# Altium PCB US_BB_PCB.PcbDoc
Units mm, origin at the board's own origin, x right, y up, seen from the top; angles counter-clockwise.
Board outline 89 x 93.3 mm, 2 copper layers (Top Layer, Bottom Layer), stack 1.58 mm thick; 53 components, 31 nets, 201 pads, 169 vias.
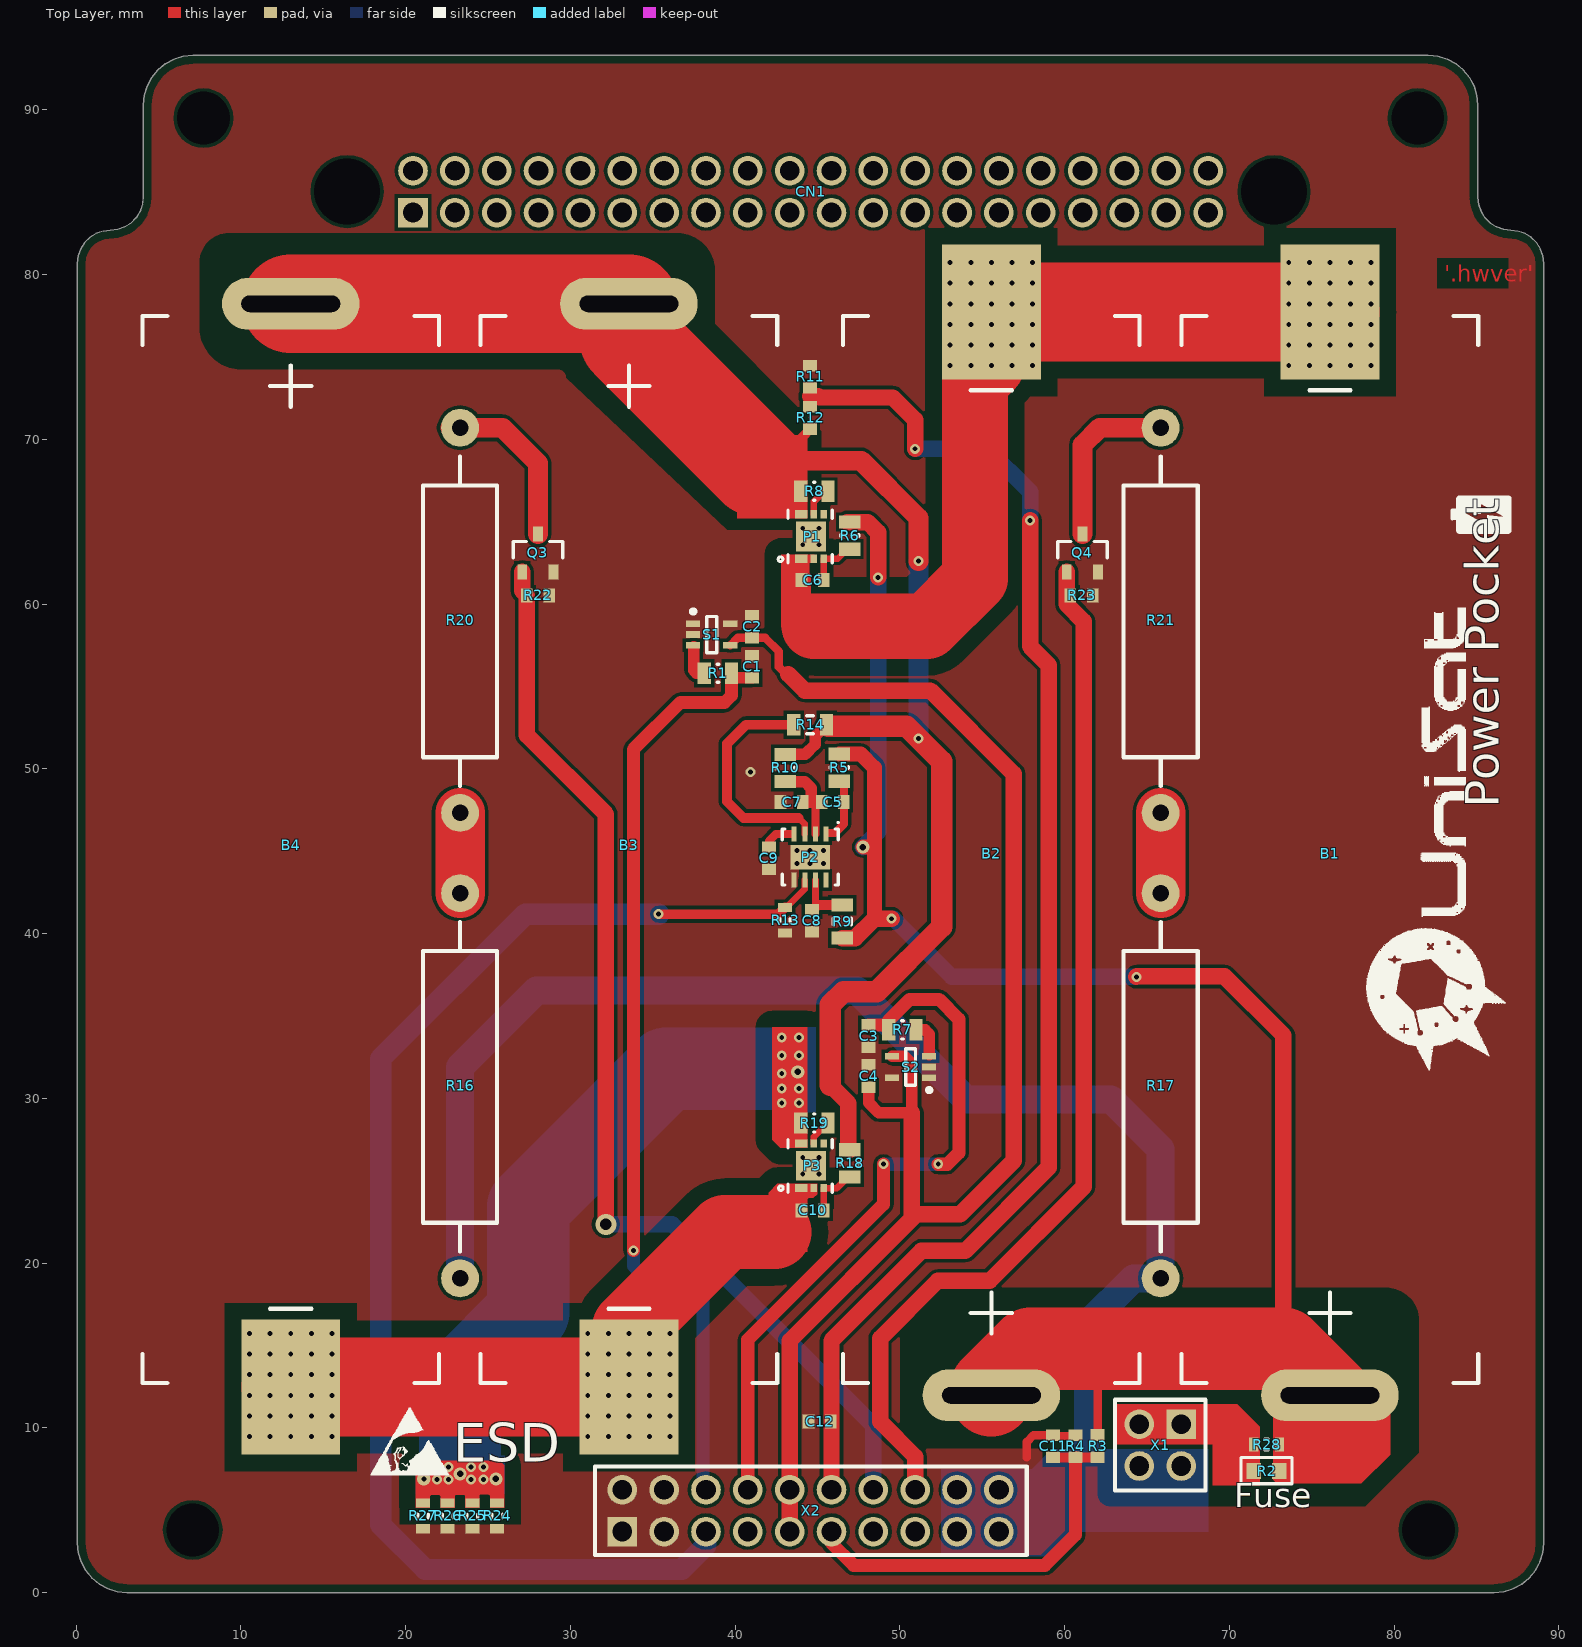
[diagram p0: Top Layer view]
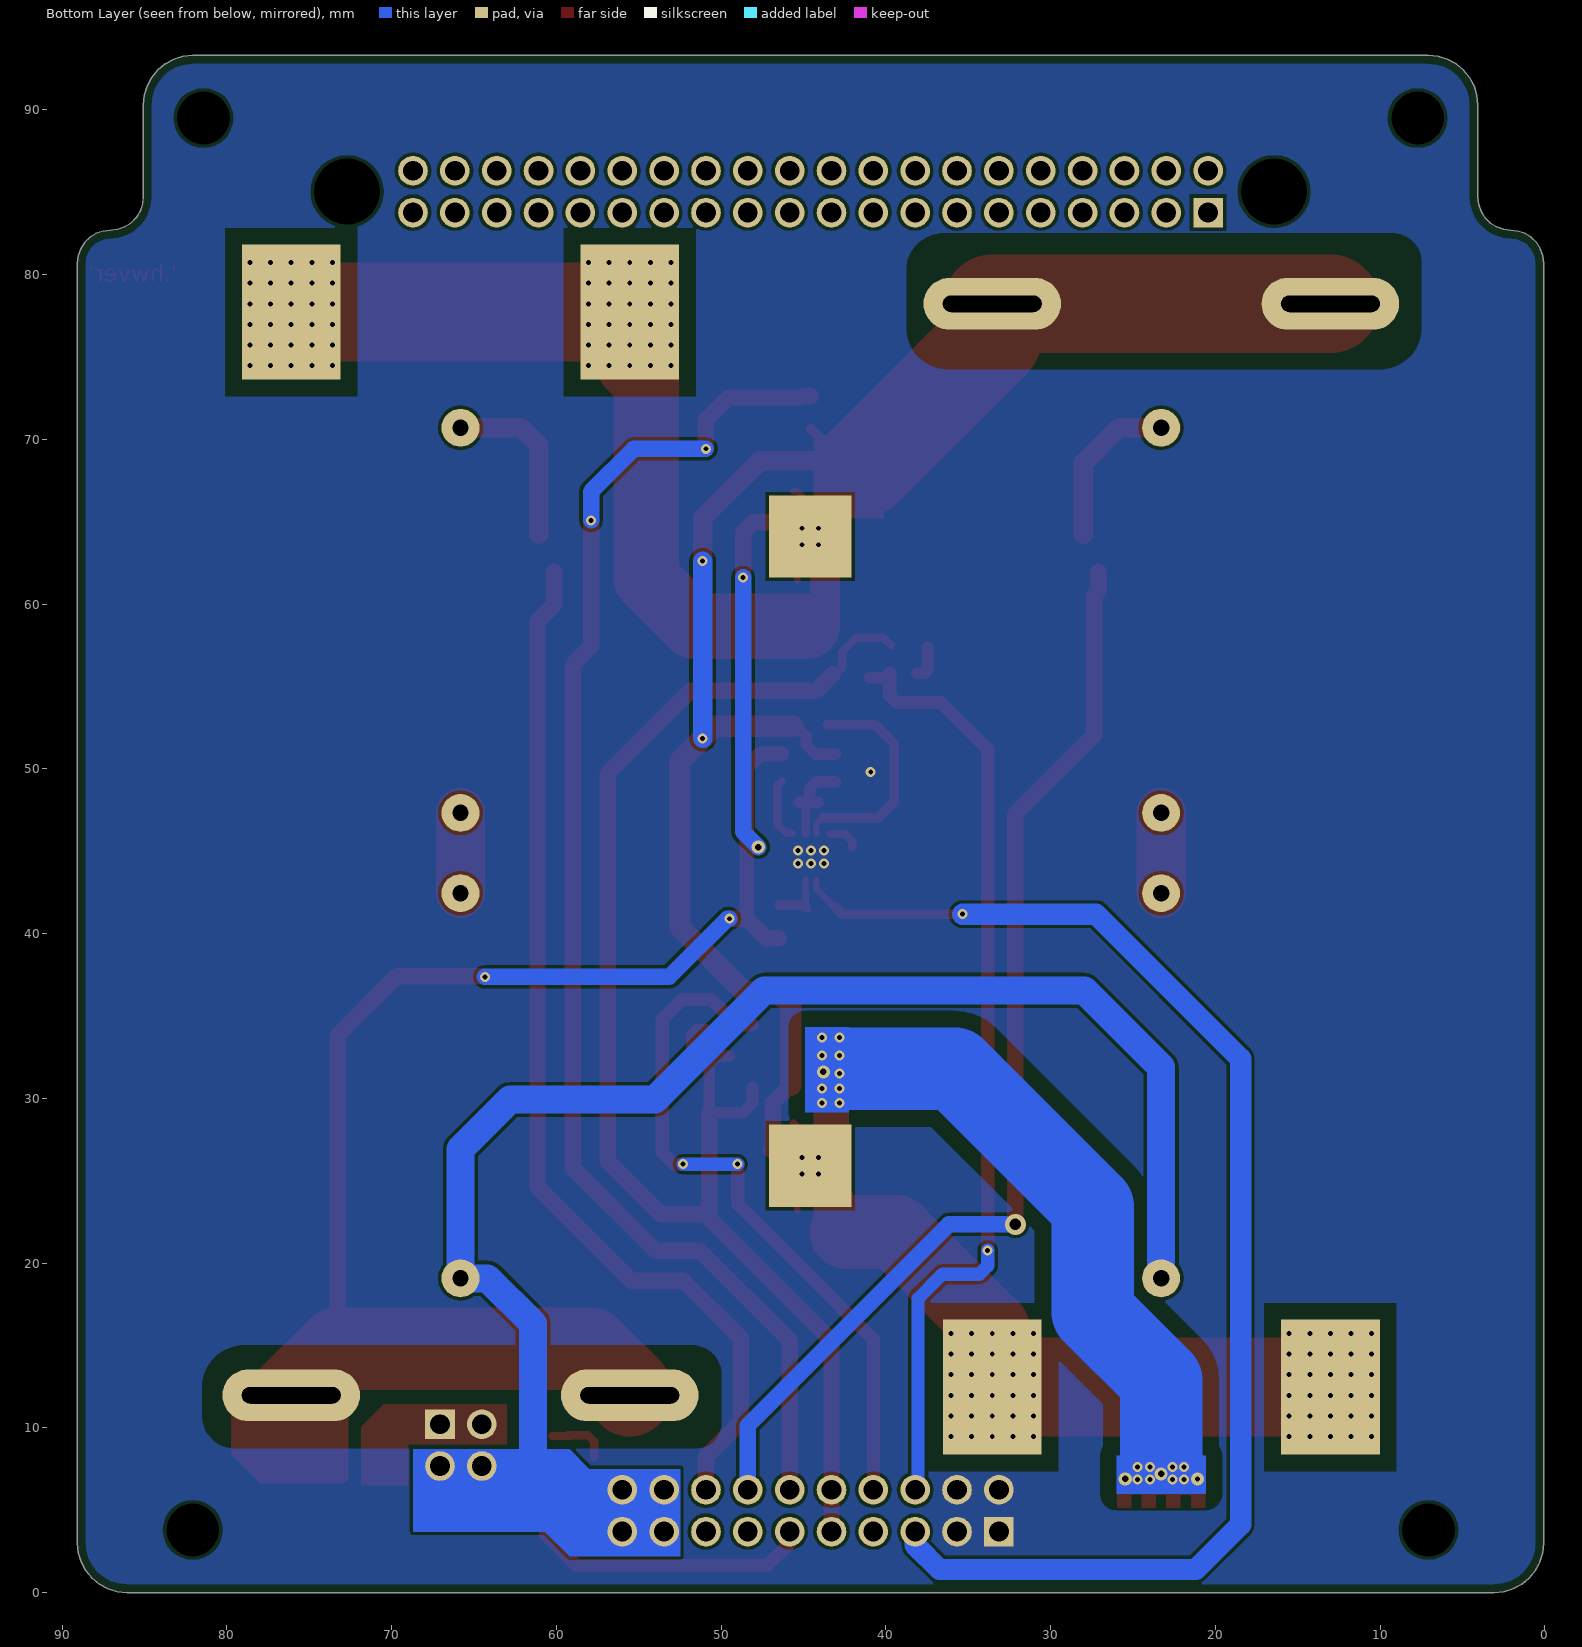
[diagram p1: Bottom Layer view, seen from below]
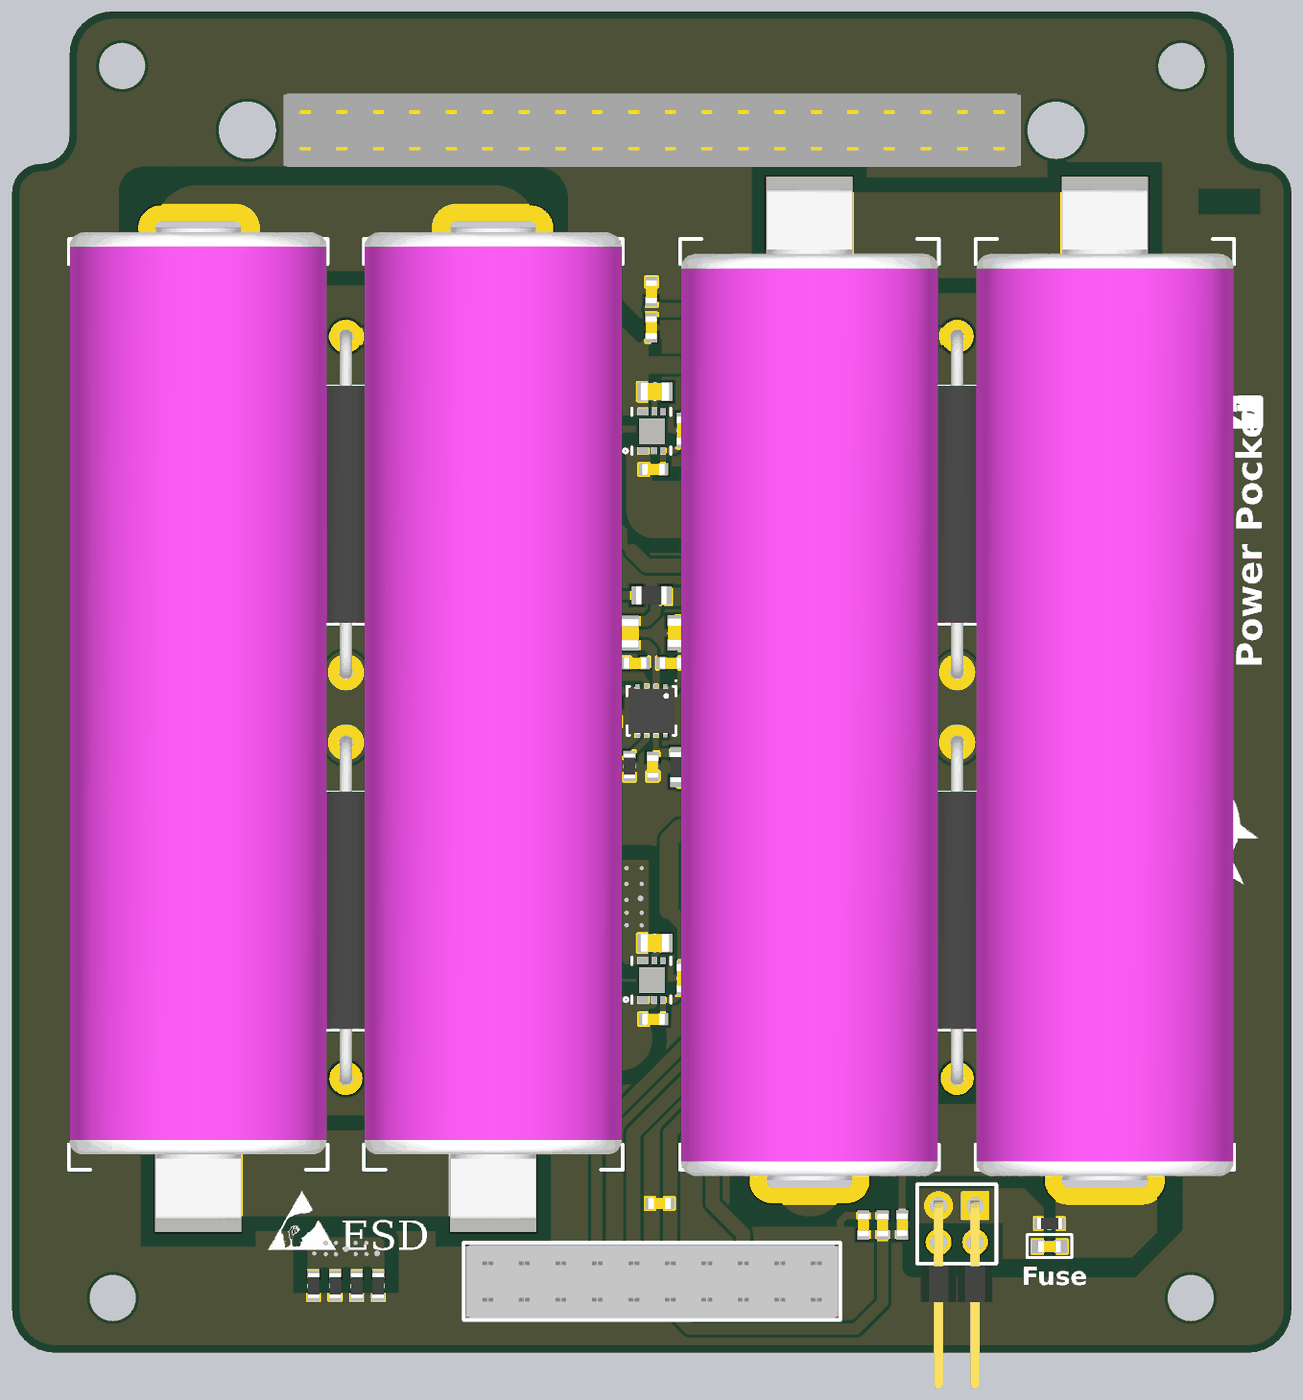
[diagram p2: 3D render of the assembled board from above, using the file's embedded part models]

## Layer stack, top to bottom
Top Solder: solder mask 0.0102, Solder Resist, Dk 3.5
Top Layer: signal copper 0.0356
Dielectric 1: dielectric 1.5086, FR-4, Dk 4.8
Bottom Layer: signal copper 0.0356
Bottom Solder: solder mask 0.0102, Solder Resist, Dk 3.5

## Board outline
82.076,93.3 7.076,93.3 6.49,93.242 5.928,93.072 5.409,92.794 4.954,92.421 4.581,91.967 4.304,91.448 4.133,90.885 4.076,90.3 4.076,84.692 4.026,84.247 3.878,83.824 3.639,83.445 3.323,83.129 2.943,82.89 2.521,82.742 2.076,82.692 1.631,82.642 1.208,82.494 0.829,82.256 0.512,81.939 0.274,81.56 0.126,81.137 0.076,80.692 0.076,3 0.133,2.415 0.304,1.852 0.581,1.333 0.954,0.879 1.409,0.506 1.928,0.228 2.49,0.058 3.076,0 86.076,0 86.661,0.058 87.224,0.228 87.742,0.506 88.197,0.879 88.57,1.333 88.847,1.852 89.018,2.415 89.076,3 89.076,80.692 89.026,81.137 88.878,81.56 88.639,81.939 88.323,82.256 87.943,82.494 87.521,82.642 87.076,82.692 86.631,82.742 86.208,82.89 85.829,83.129 85.512,83.445 85.274,83.824 85.126,84.247 85.076,84.692 85.076,90.3 85.018,90.885 84.847,91.448 84.57,91.967 84.197,92.421 83.742,92.794 83.224,93.072 82.661,93.242

## Design rules (kind name [scope] priority, off if disabled: settings)
BoardOutlineClearance [All] p1: gap=0.5
Clearance Clearance_HV [InNetClass('HV') vs InNet('GND')] p1: gap=1
Clearance Clearance_ALL [All] p2: gap=0.2
HoleSize [All] p1: absolutevalues=TRUE maxlimit=6.2 minlimit=0.3 maxpercent=80.000 minpercent=20.000
MinimumAnnularRing [All] p1: minimumring=0.152
MinimumSolderMaskSliver [All] p1: minsoldermaskwidth=0.09
PolygonConnect [InNet('GND')] p1: connectstyle=Direct reliefconductorwidth=0.254 reliefentries=4 polygonreliefangle="90 Angle" airgapwidth=0.254
PolygonConnect PolygonConnect_gnd_via [InNet('GND')and IsVia] p2: connectstyle=Direct reliefconductorwidth=0.254 reliefentries=4 polygonreliefangle="90 Angle" airgapwidth=0.254
PolygonConnect PolygonConnect_ALL [All] p3: connectstyle=Relief reliefconductorwidth=0.254 reliefentries=4 polygonreliefangle="90 Angle" airgapwidth=0.254
RoutingVias [All] p1: holewidth=0.3 width=0.7 viastyle="Through Hole" minholewidth=0.2 minwidth=0.604 maxholewidth=0.711 maxwidth=1.27
ShortCircuit ShortCircuit_ap [HasFootprint('U-DFN2030-6 (Type C)') vs HasFootprint('U-DFN2030-6 (Type C)')] p1: allowed=TRUE
ShortCircuit ShortCircuit_all [All] p2: allowed=FALSE
SilkToSolderMaskClearance [IsPad] p1: minsilkscreentomaskgap=0.153 clearancetoexposedcopper=TRUE
SolderMaskExpansion [All] p1: expansion=0.102
Width [All] p1: maxlimit=10 minlimit=0.25 preferedwidth=1
26 further rules are at their usual default settings.

## Classes and differential pairs
net class HV: NetB1_2 NetB3_2 NetP3_6

## Components (designator, comment, footprint, x,y, rotation, side; value= is the part's Value field where it differs from the comment)
B1 "3.0Ah" "BAT18650 1S-MSL" 76.1,11.975 r180 top locked
B2 "3.0Ah" "BAT18650 1S-MSL" 55.55,11.975 r180 top locked
B3 "3.0Ah" "BAT18650 1S-MSL" 33.55,78.225 r0 top locked
B4 "3.0Ah" "BAT18650 1S-MSL" 13.025,78.225 r0 top locked
C1 "100n" C0603_IPC_HD 41.025,56.2 r90 top
C2 "100n" C0603_IPC_HD 41.025,58.625 r90 top
C3 "100n" C0603_IPC_HD 48.1,33.775 r270 top
C4 "100n" C0603_IPC_HD 48.1,31.35 r90 top
C5 "100n" C0603_IPC_HD 45.925,47.975 r0 top
C6 "100n" C0603_IPC_HD 44.7,61.45 r0 top
C7 "100n" C0603_IPC_HD 43.425,47.975 r0 top
C8 "100n" C0603_IPC_HD 44.65,40.775 r90 top
C9 "100n" C0603_IPC_HD 42.05,44.575 r90 top
C10 "100n" C0603_IPC_HD 44.7,23.2 r0 top
C11 "100n" C0603_IPC_HD 59.3,8.875 r90 top
C12 "100n" C0603_IPC_HD 45.125,10.375 r0 top
CN1 "55040F" HEADER_40PIN_12MM2 20.446,83.76 r0 top locked
P1 "AP9211SA-AF-HAC-7" "U-DFN2030-6 (TYPE C)" 44.6,64.1 r90 top locked
P2 "BQ29209DRBR" BQ29209_SON65P300X100_HS-9N 44.55,44.645 r270 top
P3 "AP9211SA-AF-HAC-7" "U-DFN2030-6 (TYPE C)" 44.6,25.9 r90 top locked
Q3 "BSS205NH6327XTSA1" SOT23 28.025,63.1 r90 top
Q4 "BSS205NH6327XTSA1" SOT23 61.075,63.1 r90 top
R1 "2.7 kOhms" C0805_IPC_HD 38.95,55.8 r180 top
R2 "3.15A" C0603_IPC_MD 72.25,7.375 r180 top
R3 "499k" C0603_IPC_HD 62,8.889 r270 top
R4 "200k" C0603_IPC_HD 60.65,8.875 r90 top
R5 "160R" C0805_IPC_HD 46.325,50.075 r270 top
R6 "330R" C0805_IPC_HD 46.95,64.15 r90 top
R7 "2.7 kOhms" C0805_IPC_HD 50.15,34.15 r0 top
R8 "2.7 kOhms" C0805_IPC_HD 44.8,66.85 r0 top
R9 "100R" R0805_IPC_MD 46.5,40.725 r270 top
R10 "261R" C0805_IPC_HD 43.05,50.05 r270 top
R11 "10k" C0603_IPC_HD 44.55,73.8 r270 top
R12 "10k" C0603_IPC_HD 44.55,71.3 r270 top
R13 "0R" R0603_IPC_MD 43.025,40.8 r90 top
R14 "100R" R0805_IPC_MD 44.55,52.675 r0 top
R16 "10R" FMP300JT-73-10R 23.3,42.45 r270 top locked
R17 "10R" FMP300JT-73-10R 65.825,42.45 r270 top locked
R18 "330R" C0805_IPC_HD 46.95,26.05 r90 top
R19 "2.7 kOhms" C0805_IPC_HD 44.8,28.5 r0 top
R20 "10R" FMP300JT-73-10R 23.3,70.7 r270 top locked
R21 "10R" FMP300JT-73-10R 65.825,70.7 r270 top locked
R22 "10k" C0603_IPC_HD 28.025,60.525 r180 top
R23 "10k" C0603_IPC_HD 61.025,60.525 r0 top
R24 "0R" R0603_IPC_MD 25.55,4.65 r90 top
R25 "0R" R0603_IPC_MD 24.05,4.65 r90 top
R26 "0R" R0603_IPC_MD 22.55,4.65 r90 top
R27 "0R" R0603_IPC_MD 21.05,4.65 r90 top
R28 "0R" R0603_IPC_MD 72.25,8.975 r180 top
S1 "LMT84DCKR" LMT84DCKR_SOT65P210X110-5N 38.575,58.15 r0 top
S2 "LMT84DCKR" LMT84DCKR_SOT65P210X110-5N 50.65,31.9 r180 top
X1 "PREC002DAAN-RC" GPLD_2X2 65.8,8.95 r270 top
X2 "DS1023-2*10SF11" ESQ-110-33-T-D 33.146,3.7 r90 top locked

## Footprints (in the part's own frame and the unit in brackets; to place one, negate y for a bottom-side part, rotate by r counter-clockwise, add the part's x,y. Pads: shape width x height; smd on the part's side, far side on the other; paste and mask are expansions set on the pad)
"BAT18650 1S-MSL" [mm]
  oval 8.35x3.15 hole 1 slot 6 at 0 deg: 1(0,0)
  rect 6x8.2 smd: 2(0,-65.75)
  rect 6x8.2 smd far side: 2(0,-65.75)
  silkscreen extent -9,-65.5 9,-0.75, body extent -9,-68.95 9,0, height 18.8
BQ29209_SON65P300X100_HS-9N [mm] "SON, 8-Leads, Body 3,00x3,00mm, Pitch 0,65mm, Thermal Pad 2,40x1,49mm, IPC Medium Density"
  rect 0.9x0.3 smd mask+0.051: 1(-1.395,0.975) 2(-1.395,0.325) 3(-1.395,-0.325) 4(-1.395,-0.975) 5(1.395,-0.975) 6(1.395,-0.325) 7(1.395,0.325) 8(1.395,0.975)
  rect 1.49x2.4 smd mask+0.051: 9(0,0)
  silkscreen extent -2.15,-1.7 1.7,1.75, body extent -1.6,-1.55 1.6,1.55, height 1
C0603_IPC_HD [mm] "Chip Capacitor, 2-Leads, Body 1,60x0,80mm, IPC High Density"
  rect 0.7x0.85 smd: 1(-0.675,0) 2(0.675,0)
  body extent -0.8,-0.4 0.8,0.4, height 0.8
C0603_IPC_MD [mm] "Chip Capacitor, 2-Leads, Body 1,60x0,80mm, IPC Medium Density"
  rect 0.9x0.95 smd: 1(-0.775,0) 2(0.775,0)
  body extent -0.8,-0.4 0.8,0.4, height 0.8
C0805_IPC_HD [mm] "Chip Capacitor, 2-Leads, Body 2,00x1,25mm, IPC High Density"
  rect 0.8x1.3 smd: 1(-0.825,0) 2(0.825,0)
  silkscreen extent -0.05,-0.55 0.05,0.55, body extent -1,-0.63 1,0.63, height 1.25
ESQ-110-33-T-D [mm] "CONN SOCKET 20POS 0.1 TIN PCB"
  rect 1.8x1.8 hole 1.2: 1(0,0)
  round 1.8 hole 1.2: 2(2.54,0) 3(0,-2.54) 4(2.54,-2.54) 5(0,-5.08) 6(2.54,-5.08) 7(0,-7.62) 8(2.54,-7.62) 9(0,-10.16) 10(2.54,-10.16) 11(0,-12.7) 12(2.54,-12.7) 13(0,-15.24) 14(2.54,-15.24) 15(0,-17.78) 16(2.54,-17.78) 17(0,-20.32) 18(2.54,-20.32) 19(0,-22.86) 20(2.54,-22.86)
  silkscreen extent -1.43,-24.55 3.95,1.65, body extent -1.29,-24.41 3.79,1.5, height 16.41
FMP300JT-73-10R [mm] "RES 10 OHM 3W 5% AXIAL"
  round 2.3 hole 1: 1(0,0) 2(23.375,0)
  silkscreen extent 1.75,-2.25 21.75,2.25, body extent -0.43,-2.76 23.8,2.76, height 5.51
GPLD_2X2 [mm] "CONN SOCKET 20POS 0.1 TIN PCB"
  rect 1.8x1.8 hole 1.2: 1(-1.27,1.27)
  round 1.8 hole 1.2: 2(-1.27,-1.27) 3(1.27,-1.27) 4(1.27,1.27)
  silkscreen extent -2.75,-2.75 2.75,2.75, body extent -1.59,-2.54 11.45,2.54, height 5
HEADER_40PIN_12MM2 [mm] "CONN HEADER R/A 40POS 2.54MM"
  rect 1.8x1.8 hole 1.2: 1(0,0)
  round 1.8 hole 1.2: 2(0,2.54) 3(2.54,0) 4(2.54,2.54) 5(5.08,0) 6(5.08,2.54) 7(7.62,0) 8(7.62,2.54) 9(10.16,0) 10(10.16,2.54) 11(12.7,0) 12(12.7,2.54) 13(15.24,0) 14(15.24,2.54) 15(17.78,0) 16(17.78,2.54) 17(20.32,0) 18(20.32,2.54) 19(22.86,0) 20(22.86,2.54) 21(25.4,0) 22(25.4,2.54) 23(27.94,0) 24(27.94,2.54) 25(30.48,0) 26(30.48,2.54) 27(33.02,0) 28(33.02,2.54) 29(35.56,0) 30(35.56,2.54) 31(38.1,0) 32(38.1,2.54) 33(40.64,0) 34(40.64,2.54) 35(43.18,0) 36(43.18,2.54) 37(45.72,0) 38(45.72,2.54) 39(48.26,0) 40(48.26,2.54)
  round 2 hole 4 unplated: PMNT1(-4,1.275) PMNT2(52.26,1.27)
  body extent -1.5,-1.26 49.81,3.82, height 11.05
LMT84DCKR_SOT65P210X110-5N [mm] "SOT23, 5-Leads, Body 2,00x2,10mm, Pitch 0,65mm, IPC Medium Density"
  rect 0.85x0.4 smd mask+0.051: 1(-1.125,0.65) 2(-1.125,0) 3(-1.125,-0.65) 4(1.125,-0.65) 5(1.125,0.65)
  silkscreen extent -1.25,-1.1 0.3,1.52, body extent -1.2,-1.07 1.2,1.07, height 1.1
R0603_IPC_MD [mm] "Chip Resistor, 2-Leads, Body 1,60x0,80mm, IPC Medium Density"
  rect 0.55x0.85 smd: 1(-0.775,0) 2(0.775,0)
  silkscreen extent -0.1,-0.33 0.1,0.33, body extent -0.85,-0.4 0.85,0.4, height 0.45
R0805_IPC_MD [mm] "Chip Resistor, 2-Leads, Body 2,00x1,25mm, IPC Medium Density"
  rect 0.8x1.3 smd: 1(-1,0) 2(1,0)
  silkscreen extent -0.2,-0.55 0.2,0.55, body extent -1.05,-0.63 1.05,0.63, height 0.5
SOT23 [mm] "SOT23, 3-Leads, Body 2,90x2,30mm, Pitch 0,95mm, IPC Medium Density"
  rect 0.9x0.6 smd: 1(-1.15,0.95) 2(-1.15,-0.95) 3(1.15,0)
  silkscreen extent -0.3,-1.5 0.7,1.5, body extent -1.25,-1.5 1.25,1.5, height 1.1
"U-DFN2030-6 (TYPE C)" [mm] "IC BATT PROTECTION LI-ION 6UDFN"
  rect 0.5x0.75 smd mask+0.051: 1(-1.35,0.6) 6(1.35,0.6)
  rect 0.5x0.4 smd mask+0.051: 2(-1.35,-0.175) 3(-1.35,-0.775) 4(1.35,-0.775) 5(1.35,-0.175)
  rect 1.8x1.8 smd mask+0.051: 7(0,0)
  rect 5x5 smd far side mask+0.051: 7(0,0)
  silkscreen extent -1.6,-1.3 1.6,1.99, body extent -1.5,-1 1.5,1, height 0.6

## Part data
B1 B2 B3 B4: library part "18650 3.7V Li-ion", "18650 3.7V Lithium-Ion Battery Rechargeable (Secondary) 2.6Ah"
C1 C2 C3 C4 C5 C6 C7 C8 C9 C10 C11 C12: library part CL10B104KO8NNNC, "CAP CER 0.1UF 16V X7R 0603"
CN1: library part ALFASAT_BIC, "CONN HEADER R/A 40POS 2.54MM"
P1 P3: library part AP9211SA-AF, "Battery Battery Protection IC Lithium-Ion U-DFN2030-6 (Type C)"
P2: "Battery Battery Protection IC Lithium-Ion 8-SON (3x3)"
Q3 Q4: "N-Channel 20V 2.5A (Ta) 500mW (Ta) Surface Mount SOT-23-3"
R1 R7 R8 R19: library part CR0805_RMC_2.7k, "RES 2.7K OHM 1% 1/8W 0805"
R2: library part CR0603_3A15, "FUSE BOARD MNT 3.15A 32VDC 0603"
R3: library part CR0603-JW-499K, "RES 499K OHM 1% 1/10W 0603"
R4: library part CR0603-JW-200k, "RES 200K OHM 1% 1/10W 0603"
R5: library part CR0805_RMC_160R, "RES SMD 160 OHM 1% 1/8W 0805"
R6 R18: library part CR0805_RMC_330R, "RES 330 OHM 1% 1/8W 0805"
R9 R14: library part CR0805_RMC1_100R, "RES 100 OHM 1% 1/8W 0805"
R10: library part CR0805_RMC_261R, "RES SMD 261 OHM 1% 1/8W 0805"
R11 R12 R22 R23: library part CR0603-JW-10k, "RES 10K OHM 1% 1/10W 0603"
R13 R24 R25 R26 R27 R28: library part CR0603-J/-000ELF, "RES SMD 0 OHM JUMPER 1/10W 0603"
R16 R17 R20 R21: library part FMP300JT-73-10R, "RES 10 OHM 3W 5% AXIAL"
S1 S2: "Temperature Sensor Analog, Local -50°C ~ 150°C 5.5mV/°C SC-70-5"
X1: library part PLD_2X2, "Connector Header Through Hole 4 position 0.100\" (2.54mm)"
X2: "20 Position Elevated Socket Connector  Through Hole"

## Free pads (board coordinates)
  round 2 hole 3.2: 1(7.076,3.8) 1(7.726,89.5) 1(81.426,89.5) 1(82.076,3.8)

## Via types
v1: diameter 0.605, hole 0.3, Top Layer to Bottom Layer, tented bottom, 120 vias
v2: diameter 0.605, hole 0.3, Top Layer to Bottom Layer, tented both sides, 29 vias
v3: diameter 0.605, hole 0.3, Top Layer to Bottom Layer, 14 vias
v4: diameter 0.8, hole 0.4, Top Layer to Bottom Layer, tented both sides, 4 vias
v5: diameter 1.27, hole 0.711, Top Layer to Bottom Layer, tented both sides, 1 vias
v6: diameter 0.8, hole 0.3, Top Layer to Bottom Layer, tented both sides, 1 vias

## Nets (pads, with @x,y where several pads share a name; then routed paths per layer and width w, separated by ;. In a path a pad name is that pad's centre, name@x,y a point inside that pad or via, vN(x,y) a via of type N, cw(c..) or ccw(c..) an arc to the next point about the centre after c; other vN are vias at no path point)
3V3: C2.1 C4.1 S1.4 S2.4 X2.9 X2.10 | length 89.2
  Top Layer w0.5: S1.4 40.15,57.95 C2.1 41.825,57.95 42.65,57.125 42.65,56.175 43.075,55.75 43.225,55.75
  Top Layer w0.7: C4.1 48.1,29.725 48.7,29.125 50.725,29.125 50.725,32.1 50.275,32.55 S2.4
  Top Layer w1: 43.225,55.75 44.225,54.75 51.85,54.75 56.9,49.7 56.9,26.2 53.65,22.95 50.975,22.95 50.725,22.7 ; X2.9 X2.10 43.306,15.281 50.725,22.7 ; 50.725,29.125 50.725,22.7
GND: C1.2 C2.2 C3.2 C4.2 C7.1 C8.1 C9.1 C11.2 C12.1 P2.5 P2.9 Q3.2 Q4.2 R4.2 R11.1 R13.1 R22.1 R23.2 R24.1 R25.1 R26.1 R27.1 S1.1 S1.2 S1.5 S2.1 S2.2 S2.5 X2.1 X2.2 X2.3 X2.4 | length 3.8
  Top Layer w0.5: 57.7,8.2 57.7,9.15 58.1,9.55 C11.2 ; C11.2@59.15,9.5 R4.2@60.25,9.5
  other v2: 40.925,49.8
  other v3: 43.75,44.245 44.55,44.245 45.35,44.245 43.75,45.045 44.55,45.045 45.35,45.045
HEATER0: Q3.1 R22.2 X2.14 | length 66.9
  Top Layer w1: Q3.1 27.075,60.8 R22.2 27.35,52.05 32.15,47.25 v5(32.15,22.35)
  Bottom Layer w1: v5(32.15,22.35) 36.175,22.35 48.386,10.139 X2.14
HEATER1: Q4.1 R23.1 X2.16 | length 64
  Top Layer w1: X2.16 50.926,8.249 48.8,10.375 48.8,15.425 52.3,18.925 55.45,18.925 61.15,24.625 61.15,58.95 60.125,59.975 Q4.1
NetB1_1: B1.1 B2.1 R2.1 R3.1 R5.1 R6.2 R9.2 R28.1 | length 112
  Top Layer w0.5: 60.725,14.8 62,13.525 R3.1
  Top Layer w0.9: R5.1 47.625,50.9 48.45,50.075 48.45,45.25 ; v4(47.75,45.25) 48.45,45.25 ; 48.45,40.9 48.45,45.25
  Top Layer w1: R9.2 47.275,39.725 48.45,40.9 ; R6.2@46.8,64.975 R6.2 48.05,64.975 48.675,64.35 v2(48.675,61.625) ; 48.55,40.9 v2(49.5,40.9) ; v2(64.35,37.375) 64.375,37.4 69.7,37.4 73.275,33.825 73.275,14.8
  Top Layer w5: B2.1 55.55,12.4 57.95,14.8 60.725,14.8 73.275,14.8 B1.1
  Bottom Layer w1: v4(47.75,45.25) 48.675,46.175 v2(48.675,61.625) ; v2(49.5,40.9) 49.625,40.9 53.15,37.375 v2(64.35,37.375)
NetB1_2: B1.2 B2.2 C6.1 P1.1 P1.2 | length 45.1
  Top Layer w0.5: P1.1 P1.2@44.725,62.75
  Top Layer w4: 44.8,58.65 51.65,58.65 54.55,61.55 54.55,73.475 v1(55.55,74.475) v1(55.55,75.725) v1(55.55,76.975) B2.2@55.55,77.725
  Top Layer w6: B2.2@58.05,77.725 B1.2@73.6,77.725 ; B1.2@74.85,77.725 B1.2@76.1,77.725
  other v1: 53.05,74.475 54.3,74.475 56.8,74.475 58.05,74.475 73.6,74.475 74.85,74.475 76.1,74.475 77.35,74.475 78.6,74.475 53.05,75.725 54.3,75.725 56.8,75.725 58.05,75.725 73.6,75.725 74.85,75.725 76.1,75.725 77.35,75.725 78.6,75.725 53.05,76.975 54.3,76.975 56.8,76.975 58.05,76.975 73.6,76.975 74.85,76.975 76.1,76.975 77.35,76.975 78.6,76.975 53.05,78.225 54.3,78.225 55.55,78.225 56.8,78.225 58.05,78.225 73.6,78.225 74.85,78.225 76.1,78.225 77.35,78.225 78.6,78.225 53.05,79.475 54.3,79.475 55.55,79.475 56.8,79.475 58.05,79.475 73.6,79.475 74.85,79.475 76.1,79.475 77.35,79.475 78.6,79.475 53.05,80.725 54.3,80.725 55.55,80.725 56.8,80.725 58.05,80.725 73.6,80.725 74.85,80.725 76.1,80.725 77.35,80.725 78.6,80.725
NetB3_1: B3.1 B4.1 P1.6 R8.1 R10.1 R12.2 R14.2 R18.2 | length 101.6
  Top Layer w0.6: 41.7,68.7 42.95,69.95 43.85,69.95 43.85,69.825 44.075,69.6 44.075,70.15 R12.2
  Top Layer w0.7: R10.1 44.25,50.875 44.85,51.475 44.85,51.975 R14.2
  Top Layer w1: 45.775,30.8 46.875,29.7 46.875,26.95 R18.2
  Top Layer w1.2: 41.7,68.7 47.65,68.7 51.125,65.225 v2(51.125,62.6)
  Top Layer w1.3: R14.2@45.65,52.575 50.4,52.575 v2(51.125,51.85) 52.525,50.45 52.525,40.4 48.6,36.475 46.575,36.475 45.775,35.675 45.775,30.8
  Top Layer w6: B4.1 B3.1 33.55,76.1 41.325,68.325
  Bottom Layer w1.2: v2(51.125,51.85) v2(51.125,62.6)
NetB3_2: B3.2 B4.2 C10.1 P3.1 P3.2 | length 32.8
  Top Layer w4.5: B3.2@33.55,12.475 v1(33.55,13.225) v1(33.55,14.475) v1(33.55,15.725) 33.55,16.05 39.375,21.875 42.375,21.875
  Top Layer w6: B4.2@13.025,12.475 B3.2@31.05,12.475
  other v1: 10.525,9.475 11.775,9.475 13.025,9.475 14.275,9.475 15.525,9.475 31.05,9.475 32.3,9.475 33.55,9.475 34.8,9.475 36.05,9.475 10.525,10.725 11.775,10.725 13.025,10.725 14.275,10.725 15.525,10.725 31.05,10.725 32.3,10.725 33.55,10.725 34.8,10.725 36.05,10.725 10.525,11.975 11.775,11.975 13.025,11.975 14.275,11.975 15.525,11.975 31.05,11.975 32.3,11.975 33.55,11.975 34.8,11.975 36.05,11.975 10.525,13.225 11.775,13.225 13.025,13.225 14.275,13.225 15.525,13.225 31.05,13.225 32.3,13.225 34.8,13.225 36.05,13.225 10.525,14.475 11.775,14.475 13.025,14.475 14.275,14.475 15.525,14.475 31.05,14.475 32.3,14.475 34.8,14.475 36.05,14.475 10.525,15.725 11.775,15.725 13.025,15.725 14.275,15.725 15.525,15.725 31.05,15.725 32.3,15.725 34.8,15.725 36.05,15.725
NetC1_1: C1.1 R1.1 X2.6 | length 58.1
  Top Layer w0.7: R1.1 40.05,55.525 C1.1
  Top Layer w0.8: v2(33.825,20.775) 33.825,51.175 36.675,54.025 39.35,54.025 39.775,54.45 R1.1
  Bottom Layer w0.8: v2(33.825,20.775) 33.825,19.825 34.325,19.325 36.575,19.325 38.05,17.85 38.05,6.416 X2.6
NetC3_1: C3.1 R7.1 X2.8 | length 43.6
  Top Layer w0.8: X2.8@40.6,6.406 X2.8 40.766,15.341 49,23.575 v2(49,26) ; C3.1 49.025,34.45 R7.1 49.325,34.725 50.6,36 52.375,36 53.575,34.8 53.575,26.7 52.875,26 v2(52.325,26)
  Bottom Layer w0.8: v2(49,26) v2(52.325,26)
NetC5_1: C5.1 C7.2 P2.2 R10.2 | length 5.8
  Top Layer w0.5: 44.625,47.975 44.875,47.725 P2.2
  Top Layer w0.7: R10.2 44.225,49.225 44.625,48.825 44.625,47.975 ; C7.2 44.625,47.975 ; C5.1 44.625,47.975
NetC5_2: C5.2 P2.1 R5.2 | length 3.8
  Top Layer w0.5: 45.725,46.1 46.05,46.1 46.6,46.65 C5.2 46.6,48.975 R5.2
NetC6_2: C6.2 P1.3 R6.1 | length 3
  Top Layer w0.4: C6.2 P1.3 46.225,62.75 R6.1@46.8,63.325
NetC8_2: C8.2 P2.7 R9.1 | length 3.5
  Top Layer w0.4: C8.2@44.725,41.45 44.875,41.6 P2.7
  Top Layer w0.6: C8.2@44.875,41.6 45,41.725 R9.1
NetC9_2: C9.2 P2.4 | length 1.9
  Top Layer w0.5: C9.2 42.05,45.625 42.465,46.04 43.375,46.04
NetC10_2: C10.2 P3.3 R18.1 | length 3.1
  Top Layer w0.4: C10.2 P3.3 46.175,24.55 R18.1@46.85,25.225
NetP1_5: P1.5 R8.2 | length 1.9
  Top Layer w0.4: P1.5 44.775,66.225 45.4,66.85 R8.2
NetP2_3: P2.3 R14.1 | length 13.9
  Top Layer w0.4: 43.85,47.025 44.225,46.65 P2.3
  Top Layer w0.6: R14.1 40.65,52.675 39.5,51.525 39.5,48.025 40.5,47.025 43.85,47.025
NetP2_6: P2.6 R13.2 X2.5 | length 81.2
  Top Layer w0.4: R13.2 43.1,41.575 44.225,42.7 P2.6
  Top Layer w0.6: v2(35.35,41.175) 42.625,41.175 R13.2
  Bottom Layer w1.3: v2(35.35,41.175) 27.25,41.175 18.475,32.4 18.475,4.125 21.2,1.4 36.75,1.4 38.226,2.876 X2.5
NetP3_5: P3.5 R19.2 | length 1.6
  Top Layer w0.4: P3.5 44.775,27.666 45.609,28.5 R19.2
NetP3_6: P3.6 R19.1 R24.2 R25.2 R26.2 R27.2 | length 35
  Bottom Layer w5: 23.3,8.6 23.3,12.875 27.45,17.025 27.45,23.425 35.825,31.8 42.4,31.8
  other v2: 21.9,6.85 22.6,6.85 23.975,6.85 24.725,6.85 21.9,7.625 22.6,7.625 23.975,7.625 24.725,7.625 42.825,29.725 43.873,29.725 42.825,30.6 43.873,30.6 42.825,31.5 42.825,32.6 43.873,32.6 42.825,33.7 43.873,33.7
  other v4: 25.475,6.9 23.3,7.2 43.8,31.6
  other v6: 21.1,6.9
NetQ3_3: Q3.3 R20.1 | length 10.5
  Top Layer w1.2: R20.1@22.7,70.7 R20.1 25.875,70.7 28.025,68.55 Q3.3
NetQ4_3: Q4.3 R21.1 | length 10.6
  Top Layer w1.2: Q4.3 61.075,69.65 62.125,70.7 R21.1
NetR1_2: R1.2 S1.3 | length 2.1
  Top Layer w0.7: S1.3@37.475,57.4 37.475,55.975 37.65,55.8 R1.2
NetR2_2: R2.2 R28.2 X1.1 X1.2
NetR7_2: R7.2 S2.3 | length 2.2
  Top Layer w0.7: R7.2 51.525,34.15 51.775,33.9 S2.3@51.775,32.65
NetR16_1: R16.1 R20.2 | length 4.9
  Top Layer w3: R16.1 R20.2
NetR17_1: R17.1 R21.2 | length 4.9
  Top Layer w3: R17.1 R21.2
VBAT: R16.2 R17.2 X1.3 X1.4 X2.17 X2.18 X2.19 X2.20 | length 83.2
  Bottom Layer w1.5: X2.20 X2.20@56.15,6.096
  Bottom Layer w1.7: R16.2 23.3,31.9 27.95,36.55 47.4,36.55 54.025,29.925 62.825,29.925 65.825,26.925 R17.2 64.175,19.075 61.425,16.325 61.425,7.975
VBAT1: C11.1 R3.2 R4.1 X2.11 | length 24.2
  Top Layer w0.6: C11.1 R4.1 61.986,8.2 R3.2
  Top Layer w0.8: X2.11 45.846,3.004 47.2,1.65 58.8,1.65 60.65,3.5 R4.1
VBAT2: C12.2 R11.2 R12.1 X2.12 | length 84.8
  Top Layer w1: 44.55,72.6 45.05,72.6 45.112,72.538 49.562,72.538 50.925,71.175 v2(50.925,69.425) ; X2.12 45.846,15.296 51.3,20.75 53.975,20.75 59.025,25.8 59.025,56.3 57.9,57.425 v2(57.9,65.075)
  Bottom Layer w1: v2(50.925,69.425) 55.3,69.425 57.9,66.825 v2(57.9,65.075)
pads on no net: CN1.1 CN1.2 CN1.3 CN1.4 CN1.5 CN1.6 CN1.7 CN1.8 CN1.9 CN1.10 CN1.11 CN1.12 CN1.13 CN1.14 CN1.15 CN1.16 CN1.17 CN1.18 CN1.19 CN1.20 CN1.21 CN1.22 CN1.23 CN1.24 CN1.25 CN1.26 CN1.27 CN1.28 CN1.29 CN1.30 CN1.31 CN1.32 CN1.33 CN1.34 CN1.35 CN1.36 CN1.37 CN1.38 CN1.39 CN1.40 CN1.PMNT1 CN1.PMNT2 P1.4 P1.7 P2.8 P3.4 P3.7 X2.7 X2.13 X2.15
copper on no net:
  other v3: 44.1,25.4 45.1,25.4 44.1,26.4 45.1,26.4 44.1,63.6 45.1,63.6 44.1,64.6 45.1,64.6

## Polygon pours and split planes (outlines as drawn)
GND on Bottom Layer "TopLayer-GND" (solid, pour order 0): -0.2,-0.3 89.8,-0.3 89.8,61.7 89.8,93.7 -0.2,93.7
GND on Top Layer "TopLayer_GND" (solid, pour order 2): -0.2,-0.3 89.8,-0.3 89.8,93.7 -0.2,93.7

## Other copper
Top Layer:
  region net NetB1_2: 44.5,63 44.5,61.9 44.6,61.8 44.6,58.6 42.8,58.6 42.8,59.425 42.8,63
  region net NetB3_1: 44.375,65.2 44.375,69.75 40.1,69.75 40.125,69.725 40.125,65.2
  region net NetB1_1: 72.65,6.85 72.875,6.625 78,6.625 79.75,8.375 79.75,12.65 79.575,12.825 73.25,12.825 72.65,12.225
  region net NetR2_2: 63.025,9 69,9 69,6.5 71.85,6.5 71.85,10.05 70.475,11.425 63.025,11.425
  region net NetP3_6: 20.625,5.15 21.475,5.15 21.475,5.85 21.55,5.925 22.05,5.925 22.125,5.85 22.125,5.15 22.975,5.15 22.975,5.875 23.05,5.95 23.55,5.95 23.625,5.875 23.625,5.15 24.475,5.15 24.475,5.9 24.55,5.975 25.025,5.975 25.125,5.875 25.125,5.15 25.975,5.15 25.975,5.175 25.975,7.725 25.7,8 20.9,8 20.625,7.725
  region net NetP3_6: 44.375,27 44.375,34.3 42.25,34.3 42.25,27.5 42.75,27
  region net NetB3_2: 44.975,24.8 44.975,24.175 44.75,23.95 44.45,23.95 44.375,23.875 44.375,20.675 42.025,20.675 42.025,24.275 42.55,24.8
  pour cut-out: 7.5,80.75 cw(c9.25,80.75) 9.25,82.5 36.495,82.5 cw(c36.501,80.251) 38.75,80.251 38.75,77 45.25,70.5 45.25,64.5 39.514,64.5 29.75,73.75 ccw(c29.25,73.75) 29.25,74.25 10.04,74.25 cw(c10.04,76.79) 7.5,76.79
  pour cut-out: 50,10 ccw(c51.25,10) 51.25,8.75 61.5,8.75 cw(c61.5,8.25) 62,8.25 62,6 ccw(c62.75,6) 62.75,5.25 78.25,5.25 81.5,8.5 81.5,16.5 ccw(c79.5,16.5) 79.5,18.5 52.25,18.5 ccw(c52.25,16.25) 50,16.25
  text "'.hwver'" at 83.025,79.575 h1
Bottom Layer:
  region net NetP3_6: 20.6,6 26,6 26,8.3 20.6,8.3
  region net VBAT: 52.5,7.5 52.5,2.2 59.2,2.2 60.7,3.7 68.7,3.7 68.7,8.7 59.2,8.7 58,7.5
  region net NetP3_6: 42.25,29.15 44.9,29.15 44.9,34.3 42.25,34.3
  pour cut-out: 7.5,80.75 cw(c9.25,80.75) 9.25,82.5 36.5,82.5 cw(c36.5,80.25) 38.75,80.25 38.75,76.79 cw(c36.21,76.79) 36.21,74.25 10.04,74.25 cw(c10.04,76.79) 7.5,76.79
  pour cut-out: 50,13.25 50,10.25 ccw(c51.5,10.25) 51.5,8.75 79.5,8.75 ccw(c79.5,10.75) 81.5,10.75 81.5,12.46 ccw(c78.96,12.46) 78.96,15 51.75,15 ccw(c51.75,13.25)

## Silkscreen, mask and mechanical layers (free items; w line width, h text height)
Top Overlay:
  drawing of 18 lines, arcs and shapes, not listed
  text "Power Pocket" at 87.025,47.65 h3.5 r90
  text "ESD" at 22.9,7.15 h4
  text "Fuse" at 70.3,4.7 h2.5
Top Solder:
  text "'.hwver'" at 83.025,79.575 h1
Board:
  the board outline again, w0.2